# Altium PCB PCB1.PcbDoc
Units mil, origin at the board's own origin, x right, y up, seen from the top; angles counter-clockwise.
Board outline 6000 x 4000 mil, 2 copper layers (Top Layer, Bottom Layer); 36 components, 31 nets, 175 pads, 2 vias.
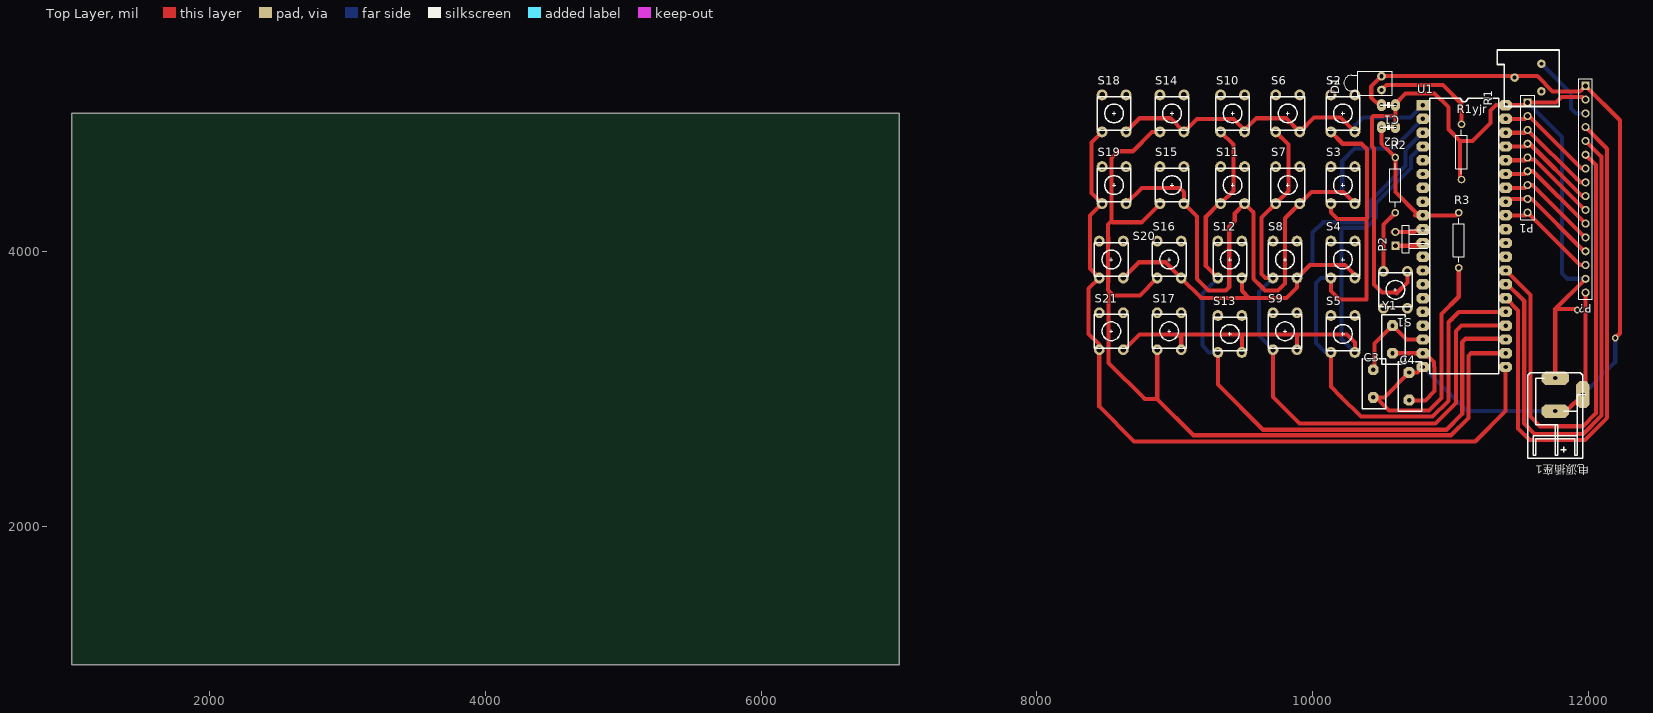
[diagram p0: Top Layer view]
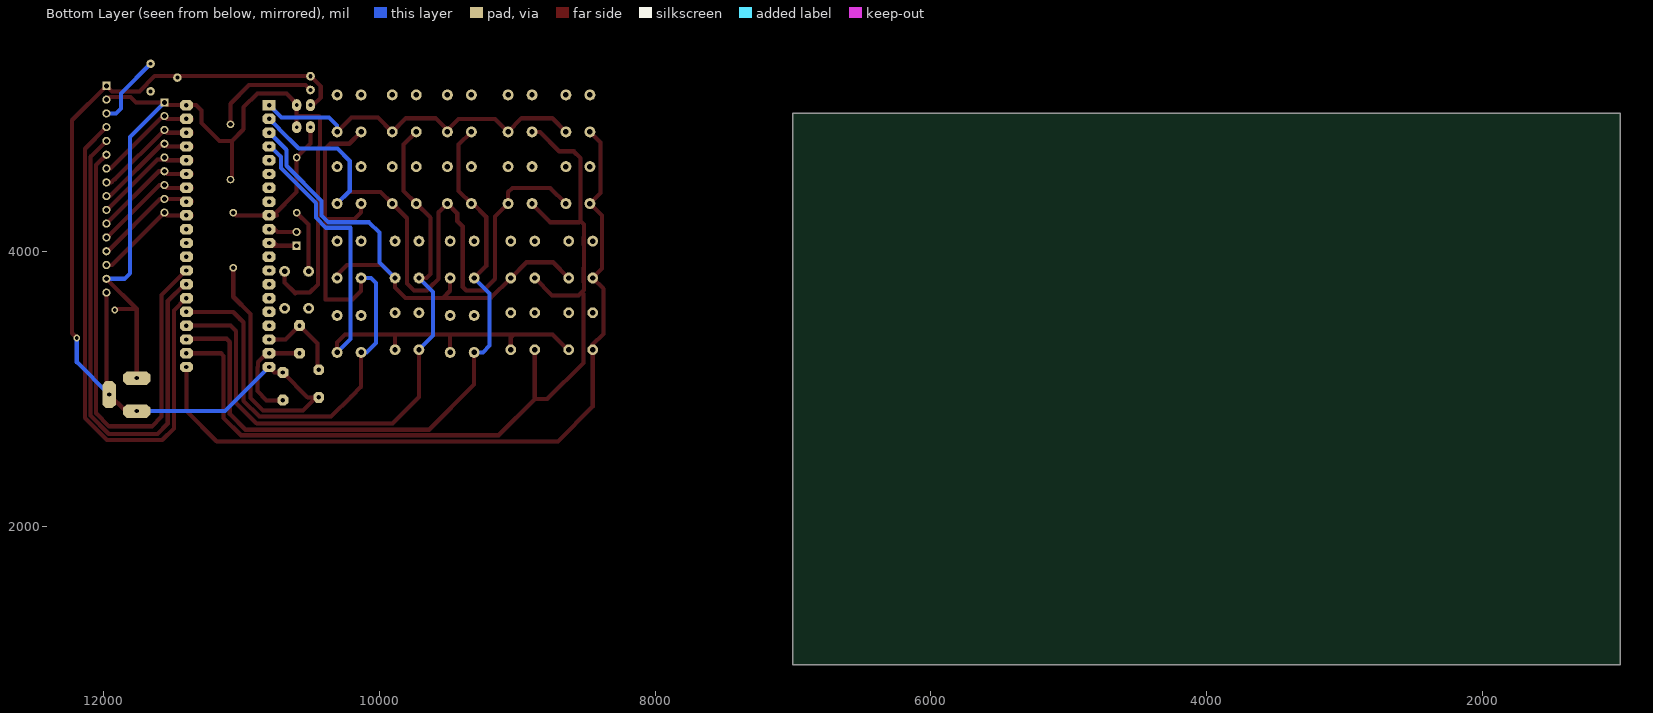
[diagram p1: Bottom Layer view, seen from below]

## Layer stack, top to bottom
Top Layer: signal copper 1.4
Dielectric: dielectric 12.6, FR-4, Dk 4.8
Bottom Layer: signal copper 1.4

## Board outline
1000,1000 7000,1000 7000,5000 1000,5000

## Design rules (kind name [scope] priority, off if disabled: settings)
Clearance [All] p1: gap=10
PolygonConnect [All] p1: connectstyle=Relief reliefconductorwidth=10 reliefentries=4 polygonreliefangle="90 Angle"
RoomDefinition Sheet1 [InComponentClass('Sheet1')] p1: confinementstyle=ConfineIn formatcopy=TRUE lockcomponents=FALSE outline 7045,960 7180,960 7180,2680 7045,2680
RoutingVias [All] p1: holewidth=28 width=50 viastyle="Through Hole" minholewidth=28 minwidth=50 maxholewidth=28 maxwidth=50
SilkscreenOverComponentPads [All] p1: minsilkscreentomaskgap=10
SolderMaskExpansion [All] p1: expansion=4
Width [All] p1: maxlimit=30 minlimit=30 preferedwidth=30
27 further rules are at their usual default settings.

## Components (designator, comment, footprint, x,y, rotation, side; value= is the part's Value field where it differs from the comment)
C1 "30p" D104 10600,5060 r180 top
C2 "30p" D104 10600,4900 r180 top
C3 "Cap" 晶振 10440,2940 r90 top
C4 "Cap" 晶振 10700,2920 r90 top
D1 "LED1" LED-1 10500,5220 r180 top
P1 "Header 9" HDR1X9 11560,5080 r270 top
P2 "Header 2H" HDR1X2H 10600,4040 r90 top
P? "Header 16" HDR1X16 11980,5200 r270 top
R1 "10k" VR-4 11660,5160 r90 top
R1yjr "Res2th" AXIAL-0.4 11080,4720 r90 top
R2 "Res2" AXIAL-0.4 10600,4480 r90 top
R3 "Res2" AXIAL-0.4 11060,4080 r90 top
S1 "SW-PB" 6X6X? 10600,3720 r180 top
S2 "SW-PB" 6X6X? 10220,5000 r0 top
S3 "SW-PB" 6X6X? 10220,4480 r0 top
S4 "SW-PB" 6X6X? 10220,3940 r0 top
S5 "SW-PB" 6X6X? 10220,3400 r0 top
S6 "SW-PB" 6X6X? 9820,5000 r0 top
S7 "SW-PB" 6X6X? 9820,4480 r0 top
S8 "SW-PB" 6X6X? 9800,3940 r0 top
S9 "SW-PB" 6X6X? 9800,3420 r0 top
S10 "SW-PB" 6X6X? 9420,5000 r0 top
S11 "SW-PB" 6X6X? 9420,4480 r0 top
S12 "SW-PB" 6X6X? 9400,3940 r0 top
S13 "SW-PB" 6X6X? 9400,3400 r0 top
S14 "SW-PB" 6X6X? 8980,5000 r0 top
S15 "SW-PB" 6X6X? 8980,4480 r0 top
S16 "SW-PB" 6X6X? 8960,3940 r0 top
S17 "SW-PB" 6X6X? 8960,3420 r0 top
S18 "SW-PB" 6X6X? 8560,5000 r0 top
S19 "SW-PB" 6X6X? 8560,4480 r0 top
S20 "SW-PB" 6X6X? 8540,3940 r0 top
S21 "SW-PB" 6X6X? 8540,3420 r0 top
U1 "AT89S52" DIP40C 10800,5060 r0 top
Y1 "11.0592MHz" 晶振 10580,3260 r90 top
电源插座1 "电源插座" DIANYUAN 11760,3080 r270 top

## Footprints (in the part's own frame and the unit in brackets; to place one, negate y for a bottom-side part, rotate by r counter-clockwise, add the part's x,y. Pads: shape width x height; smd on the part's side, far side on the other; paste and mask are expansions set on the pad)
6X6X? [mm]
  round 2 hole 1: 1(-2.22,-3.407) 2(2.2,-3.407) 3(2.2,3.4) 4(-2.22,3.4)
  silkscreen extent -3.11,-3.1 3.09,3.1
AXIAL-0.4 [mm] "Axial Device, Thru-Hole; 2 Leads; 0.4 in Pin Spacing"
  round 1.4 hole 0.85: 1(-5.08,0) 2(5.08,0)
  silkscreen extent -4.06,-1.02 4.06,1.02
D104 [mm]
  oval 1.7x2.2 hole 0.7: 1(0,0) 2(2.54,0)
  silkscreen extent -0.15,-0.55 2.82,0.52
DIANYUAN [mm]
  oct 2.5x5 hole 0.762: 1(0,0) 2(6.096,0)
  oct 5x2.5 hole 0.762: 3(3.048,5.08)
  silkscreen extent -1.02,-5.08 14.73,5.59
DIP40C [mm]
  rect 2.4x1.9 hole 0.813: 1(0,0)
  oct 2.4x1.9 hole 0.813: 2(0,-2.54) 3(0,-5.08) 4(0,-7.62) 5(0,-10.16) 6(0,-12.7) 7(0,-15.24) 8(0,-17.78) 9(0,-20.32) 10(0,-22.86) 11(0,-25.4) 12(0,-27.94) 13(0,-30.48) 14(0,-33.02) 15(0,-35.56) 16(0,-38.1) 17(0,-40.64) 18(0,-43.18) 19(0,-45.72) 20(0,-48.26) 21(15.24,-48.26) 22(15.24,-45.72) 23(15.24,-43.18) 24(15.24,-40.64) 25(15.24,-38.1) 26(15.24,-35.56) 27(15.24,-33.02) 28(15.24,-30.48) 29(15.24,-27.94) 30(15.24,-25.4) 31(15.24,-22.86) 32(15.24,-20.32) 33(15.24,-17.78) 34(15.24,-15.24) 35(15.24,-12.7) 36(15.24,-10.16) 37(15.24,-7.62) 38(15.24,-5.08) 39(15.24,-2.54) 40(15.24,0)
  silkscreen extent 1.27,-49.53 13.97,1.27
HDR1X2H [mm] "Connector; Header; 2 Position; Right Angle"
  rect 1.5x1.5 hole 0.9: 1(0,0)
  round 1.5 hole 0.9: 2(2.54,0)
  silkscreen extent -1.27,-6.35 3.81,-1.27
HDR1X9 [mm] "Connector; Header; 9 Position"
  rect 1.5x1.5 hole 0.9: 1(0,0)
  round 1.5 hole 0.9: 2(2.54,0) 3(5.08,0) 4(7.62,0) 5(10.16,0) 6(12.7,0) 7(15.24,0) 8(17.78,0) 9(20.32,0)
  silkscreen extent -1.27,-1.27 21.59,1.27
HDR1X16 [mm] "Connector; Header; 16 Position"
  rect 1.5x1.5 hole 0.9: 1(0,0)
  round 1.5 hole 0.9: 2(2.54,0) 3(5.08,0) 4(7.62,0) 5(10.16,0) 6(12.7,0) 7(15.24,0) 8(17.78,0) 9(20.32,0) 10(22.86,0) 11(25.4,0) 12(27.94,0) 13(30.48,0) 14(33.02,0) 15(35.56,0) 16(38.1,0)
  silkscreen extent -1.27,-1.27 39.37,1.27
LED-1 [mm] "Typical RED GaAs LED; 2 Leads"
  round 1.6 hole 0.8: 1(0,1.27) 2(0,-1.27)
  silkscreen extent -2,-2.2 6.95,2.2
VR-4 [mil]
  round 62 hole 28: 1(0,0) 2(200,0) 3(100,195)
  silkscreen extent -110,-130 300,320
晶振 [mm]
  oct 2x2 hole 0.8: 1(0,0) 2(5.08,0)
  silkscreen extent -2.06,-2.31 7.11,2.03

## Part data
C1 C2: library part Cap, "Capacitor"
C3 C4: "Capacitor"
D1: "Typical RED GaAs LED"
P1: "Header, 9-Pin"
P2: "Header, 2-Pin, Right Angle"
P?: "Header, 16-Pin"
R1: library part POT1, "Potentiometer"
R1yjr: library part Res2, "Resistor"
R2 R3: "Resistor"
S1 S2 S3 S4 S5 S6 S7 S8 S9 S10 S11 S12 S13 S14 S15 S16 S17 S18 S19 S20 S21: "Switch"
Y1: library part XTAL, "Crystal Oscillator"

## Via types
v1: diameter 50, hole 28, Top Layer to Bottom Layer, 2 vias

## Nets (pads, with @x,y where several pads share a name; then routed paths per layer and width w, separated by ;. In a path a pad name is that pad's centre, name@x,y a point inside that pad or via, vN(x,y) a via of type N, cw(c..) or ccw(c..) an arc to the next point about the centre after c; other vN are vias at no path point)
GND: C1.2 C3.1 C4.2 D1.2 P?.1 P?.16 R1.3 R3.1 U1.20 电源插座1.2 电源插座1.3 | length 8370.6
  Top Layer w30: C3.1 10520,2940 C4.2 10760,3120 U1.20 ; C3.1@10460,2938 10553,2845 10845,2845 10935,2935 10935,3545 11060,3670 R3.1 ; C1.2 10480,5060 10425,5115 10425,5195 D1.2 11630,5270 11740,5160 11940,5160 P?.1 12230,4950 12230,3405 v1(12195,3370) ; 电源插座1.2 11840,2840 电源插座1.3 11980,2980 P?.16
  Bottom Layer w30: U1.20 11120,2840 电源插座1.2 ; 电源插座1.3 12195,3195 v1(12195,3370)
NetC3_2: C3.2 U1.18 Y1.2 | length 639.4
  Top Layer w30: C3.2 10450,3150 10450,3330 Y1.2 10680,3360 U1.18
NetC4_1: C4.1 U1.19 Y1.1 | length 737.6
  Top Layer w30: Y1.1 U1.19 ; C4.1 10702,2918 10818,2918 10885,2985 10885,3158.43 10880,3163.43 10880,3195 U1.19@10815,3260
NetD1_1: D1.1 R1yjr.2 | length 800.4
  Top Layer w30: D1.1 10535,5205 10945,5205 11080,5070 R1yjr.2
NetP2_1: P2.1 U1.11 | length 188.3
  Top Layer w30: P2.1 U1.11@10760,4040 ; 10740,4040 U1.11@10760,4060
NetP2_2: P2.2 U1.10 | length 188.3
  Top Layer w30: P2.2@10580,4140 10740,4140 U1.10@10760,4160
NetP?_3: P?.3 R1.2 | length 533.6
  Bottom Layer w30: R1.2 11875,5145 11875,5035 11910,5000 P?.3
NetR2_1: R2.1 S1.2 | length 460.9
  Top Layer w30: S1.2 10515,3855.76 10515,4194.21 R2.1@10600,4279.21
P0.0: P1.2 P?.7 U1.39 | length 785.7
  Top Layer w30: U1.39@11360,4960 11540,4960 P1.2 11570,4980 11950,4600 P?.7
P0.1: P1.3 P?.8 U1.38 | length 785.7
  Top Layer w30: U1.38@11360,4860 11540,4860 P1.3 11920,4520 11925,4520 11945,4500 P?.8
P0.2: P1.4 P?.9 U1.37 | length 785.7
  Top Layer w30: U1.37@11360,4760 11540,4760 P1.4 11575,4780 11955,4400 P?.9
P0.3: P1.5 P?.10 U1.36 | length 785.7
  Top Layer w30: U1.36@11360,4660 11540,4660 P1.5 11575,4665 11610,4665 11975,4300 P?.10
P0.4: P1.6 P?.11 U1.35 | length 785.7
  Top Layer w30: U1.35@11360,4560 11540,4560 P1.6 11600,4580 P?.11
P0.5: P1.7 P?.12 U1.34 | length 785.7
  Top Layer w30: U1.34@11360,4460 11540,4460 P1.7 11595,4480 11975,4100 P?.12
P0.6: P1.8 P?.13 U1.33 | length 785.7
  Top Layer w30: U1.33@11360,4360 11380,4380 P1.8 11590,4380 11970,4000 P?.13
P0.7: P1.9 P?.14 U1.32 | length 785.7
  Top Layer w30: U1.32@11360,4260 11540,4260 P1.9 11940,3900 P?.14
P1.0: S2.2 S6.2 S10.2 S14.2 S18.2 U1.1 | length 2592
  Top Layer w30: S18.2 8745.76,4965 8967.47,4965 S14.2 9160.76,4960 9425,4960 S10.2@9506.61,4878.39 ; S10.2 S10.2@9506.61,4878.39 ; S2.2 10202.47,4970 10010.76,4970 S6.2 9807.47,4965 9593.23,4965 S10.2@9506.61,4878.39
  Bottom Layer w30: S2.2 10306.61,4911.61 10365,4970 10710,4970 10727.76,4987.76 10727.76,4989.06 10798.7,5060 U1.1
P1.1: S3.2 S7.2 S11.2 S15.2 S19.2 U1.2 | length 5098.5
  Top Layer w30: S19.2 8760.76,4460 9035,4460 9066.61,4428.39 S15.2 9160,4252.47 9160,3800 9245,3715 9370,3715 9395,3740 9395,4180 9435,4220 9435,4274.24 S11.2 9570,4282.47 9570,3800 9635,3735 ; 9640,3735 9635,3735 ; S3.2 10222.47,4430 9990.76,4430 S7.2 9800,4239.24 9800,3765 9750,3715 9655,3715 9635,3735
  Bottom Layer w30: S3.2 10217.47,4435 10215,4435 10215,4655 10305,4745 10585,4745 10727.76,4887.76 10727.76,4889.06 10798.7,4960 U1.2
P1.2: S4.2 S8.2 S12.2 S16.2 S20.2 U1.3 | length 3801.2
  Top Layer w30: S20.2 8740.76,3920 8932.47,3920 S16.2 9192.47,3660 9540,3660 ; S12.2 9486.61,3713.39 9540,3660 ; S4.2 10306.61,3828.39 10235,3900 9980.76,3900 S8.2 9886.61,3736.61 9810,3660 9540,3660
  Bottom Layer w30: S8.2 10000,3919.24 10000,4135 10075,4210 10370,4210 10420,4260 10420,4365 10675,4620 10675,4736.3 10798.7,4860 U1.3
P1.3: S5.2 S9.2 S13.2 S17.2 S21.2 U1.4 | length 4058.9
  Top Layer w30: S21.2 8635.86,3285.86 8745,3395 9025,3395 ; S17.2 9046.61,3373.39 9025,3395 ; S13.2 9486.61,3393.39 ; S9.2 9886.61,3386.61 9895,3395 10250,3395 10306.61,3338.39 S5.2 ; 9886.61,3395 9025,3395
  Bottom Layer w30: S5.2 10210,3362.47 10210,4170 10386.57,4170 10460,4243.43 10460,4348.43 10715,4603.43 10715,4685 10790,4760 U1.4
P2.0: S18.1 S19.1 S20.1 S21.1 U1.21 | length 5649.4
  Top Layer w30: S18.1 8395,4788.24 8395,4423.47 S19.1 8385,4258.24 8385,3873.47 S20.1 8375,3728.24 8375,3400 8452.61,3322.39 S21.1 8452.61,2872.39 8705,2620 11180,2620 11400,2840 U1.21
P2.1: S14.1 S15.1 S16.1 S17.1 U1.22 | length 6760.1
  Top Layer w30: 8515,3834.5 8515,3880 ; 8525,3695 8520,3690 8520,3190 8782.61,2927.39 8872.61,2927.39 ; S17.1 8872.61,2927.39 ; S16.1 8746.76,3680 8555,3680 8515,3720 8515,3775.23 8516.98,3777.21 8516.98,3878.02 8515,3880 ; S15.1 8892.61,4342.61 8760,4210 8550,4210 8540,4220 ; S14.1 8835.86,4865.86 8695,4725 8590,4725 8540,4675 8540,4220 ; U1.22 11150,3260 11130,3240 11130,2790 11005,2665 9135,2665 8872.61,2927.39 ; 8515,3880 8515,4045.21 8516.98,4047.2 8516.98,4100.52 8515,4102.5 8515,4195 8540,4220
P2.2: S10.1 S11.1 S12.1 S13.1 U1.23 | length 4931.3
  Top Layer w30: S13.1 9312.61,3032.39 9640,2705 10970,2705 11085,2820 11085,3340 11110,3365 11395,3365 U1.23 ; S12.1 9225,3893.47 9225,4250 9320.86,4345.86 S11.1 9425,4438.24 9425,4773.47 S10.1
  Bottom Layer w30: S13.1 9249.14,3265.86 9200,3315 9200,3693.24 S12.1
P2.3: S6.1 S7.1 S8.1 S9.1 U1.24 | length 4558.8
  Top Layer w30: S9.1 9712.61,2942.39 9905,2750 9980,2750 10890,2750 11040,2900 11040,3420 11080,3460 U1.24 ; S8.1 9659.14,3805.86 9630,3835 9630,4243.24 S7.1 9825,4438.24 9825,4773.47 S6.1
  Bottom Layer w30: S9.1 9610,3388.47 9610,3703.24 S8.1
P2.4: S2.1 S3.1 S4.1 S5.1 U1.25 | length 5072.3
  Top Layer w30: S5.1 10132.61,3017.39 10203.43,2946.57 ; S4.1 10132.61,3712.39 10195,3650 10390,3650 10390,4225 10380,4235 10180,4235 10132.61,4282.39 S3.1 ; S2.1 10218.47,4780 10355,4780 10395,4740 10395,4240 ; 10206.57,2946.57 10203.43,2946.57 ; 11015,3510 11010,3510 ; 11065,3560 11060,3560 ; U1.25 11060,3560 ; 10203.43,2946.57 10350,2800 10870,2800 10985,2915 10985,3485 11010,3510 ; 11010,3510 11060,3560
  Bottom Layer w30: S5.1 10094.14,3265.86 10025,3335 10025,3770 10060.86,3805.86 S4.1
P2.5: P?.4 U1.26 | length 3905.1
  Top Layer w30: U1.26 11401.3,3660 11490,3571.3 11490,2715 11575,2630 11975,2630 12136.72,2791.72 12136.72,4743.28 P?.4
P2.6: P?.5 U1.27 | length 3782.8
  Top Layer w30: U1.27 11415,3760 11535,3640 11535,2750 11610,2675 11963.43,2675 12096.72,2808.28 12096.72,3208.28 12095,3210 ; P?.5 12095,4685 12095,3210 ; 12095,3190 12095,3210
P2.7: P?.6 U1.28 | length 3584.7
  Top Layer w30: U1.28 11401.3,3860 11580,3681.3 11580,2800 11650,2730 11960,2730 12055,2825 12055,4625 P?.6
P3.2: U1.12
RST: C2.2 R2.2 R3.2 U1.9 | length 1075.1
  Top Layer w30: C2.2 10500,4780.79 10600,4680.79 10600,4430 U1.9@10770,4260 ; 10745,4260 10765,4260 U1.9@10770,4260 ; R3.2 11040,4260 U1.9 U1.9@10770,4260
VCC: C1.1 C2.1 P1.1 P?.2 P?.15 R1yjr.1 S1.1 U1.40 电源插座1.1 | length 6592.2
  Top Layer w30: C2.1 10600,4980 ; S1.1 10687.39,3772.39 10610,3695 10605,3700 10505,3700 10445,3760 10445,4746.57 10430,4761.57 10430,4970 10440,4980 10600,4980 ; R1yjr.1 11070,4530 11070,4800 ; U1.40@11360,5060 U1.40@11380,5060 ; 电源插座1.1 11760,3580 ; v1(11920,3575) 11915,3580 11760,3580 ; P?.15 11760,3580 ; P?.2 11960,5120 11805,5120 11765,5080 P1.1 11540,5060 U1.40 U1.40@11380,5060 ; 10600,4980 C1.1 10600,5070 10675,5145 10885,5145 10985,5045 10985,4885 11070,4800 ; 11070,4800 11160,4800 11290,4930 11290,5020 11330,5060 U1.40@11380,5060
  Bottom Layer w30: P1.1 11810,4830 11810,3840 11850,3800 P?.15
pads on no net: R1.1 S1.3 S1.4 S2.3 S2.4 S3.3 S3.4 S4.3 S4.4 S5.3 S5.4 S6.3 S6.4 S7.3 S7.4 S8.3 S8.4 S9.3 S9.4 S10.3 S10.4 S11.3 S11.4 S12.3 S12.4 S13.3 S13.4 S14.3 S14.4 S15.3 S15.4 S16.3 S16.4 S17.3 S17.4 S18.3 S18.4 S19.3 S19.4 S20.3 S20.4 S21.3 S21.4 U1.5 U1.6 U1.7 U1.8 U1.13 U1.14 U1.15 U1.16 U1.17 U1.29 U1.30 U1.31
copper on no net: | length 1.3
  Bottom Layer w30: 10798.7,4660 10800,4660